# Altium PCB Template.PcbDoc
Units mil, origin at the board's own origin, x right, y up, seen from the top; angles counter-clockwise.
Board outline 6000 x 4000 mil, 2 copper layers (Top Layer, Bottom Layer); 58 components, 41 nets, 215 pads, 0 vias.
Unrouted connection lines stored in the file: 126.
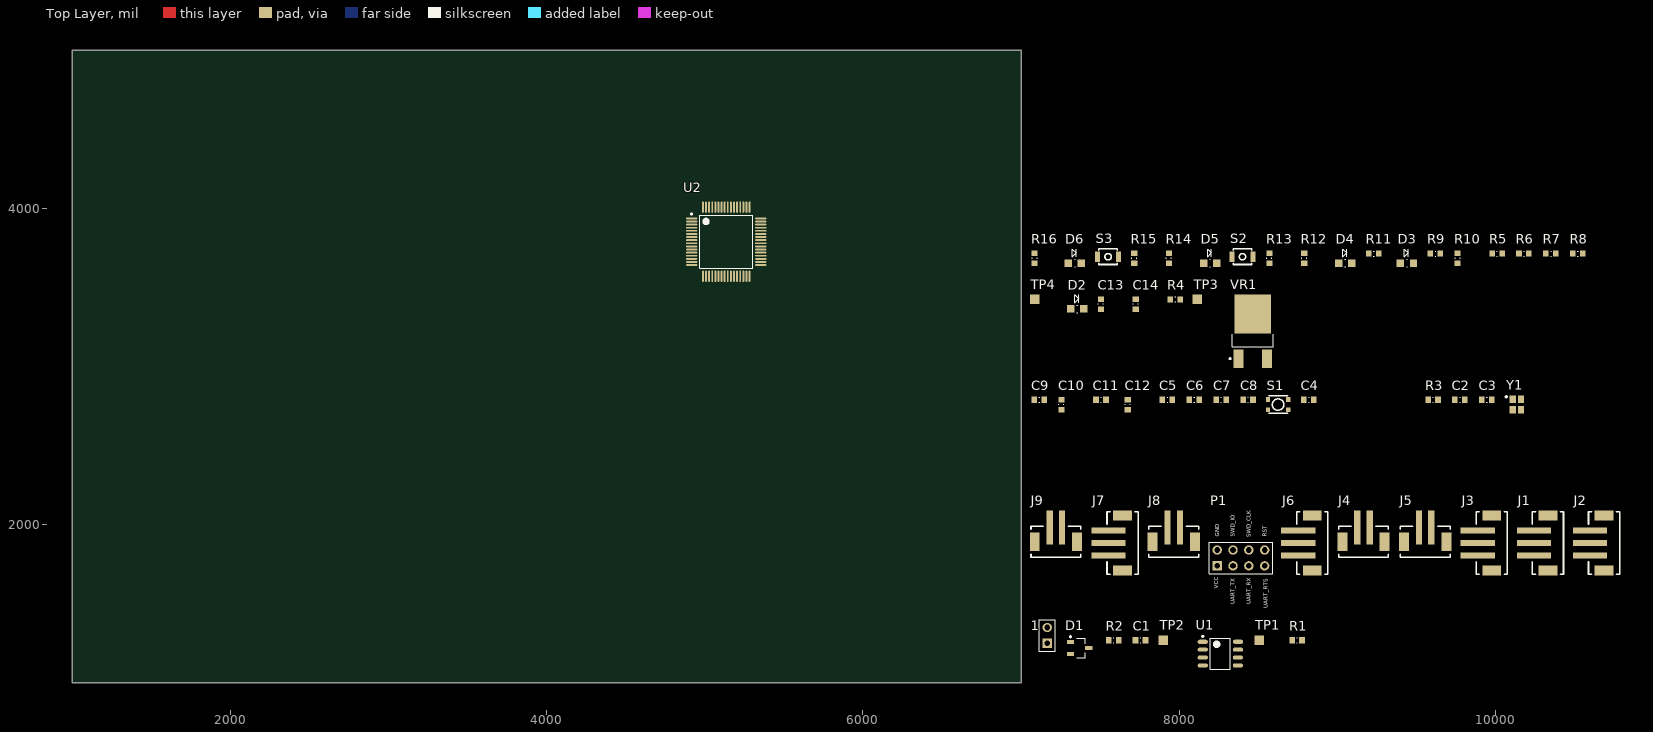
[diagram p0: Top Layer view]
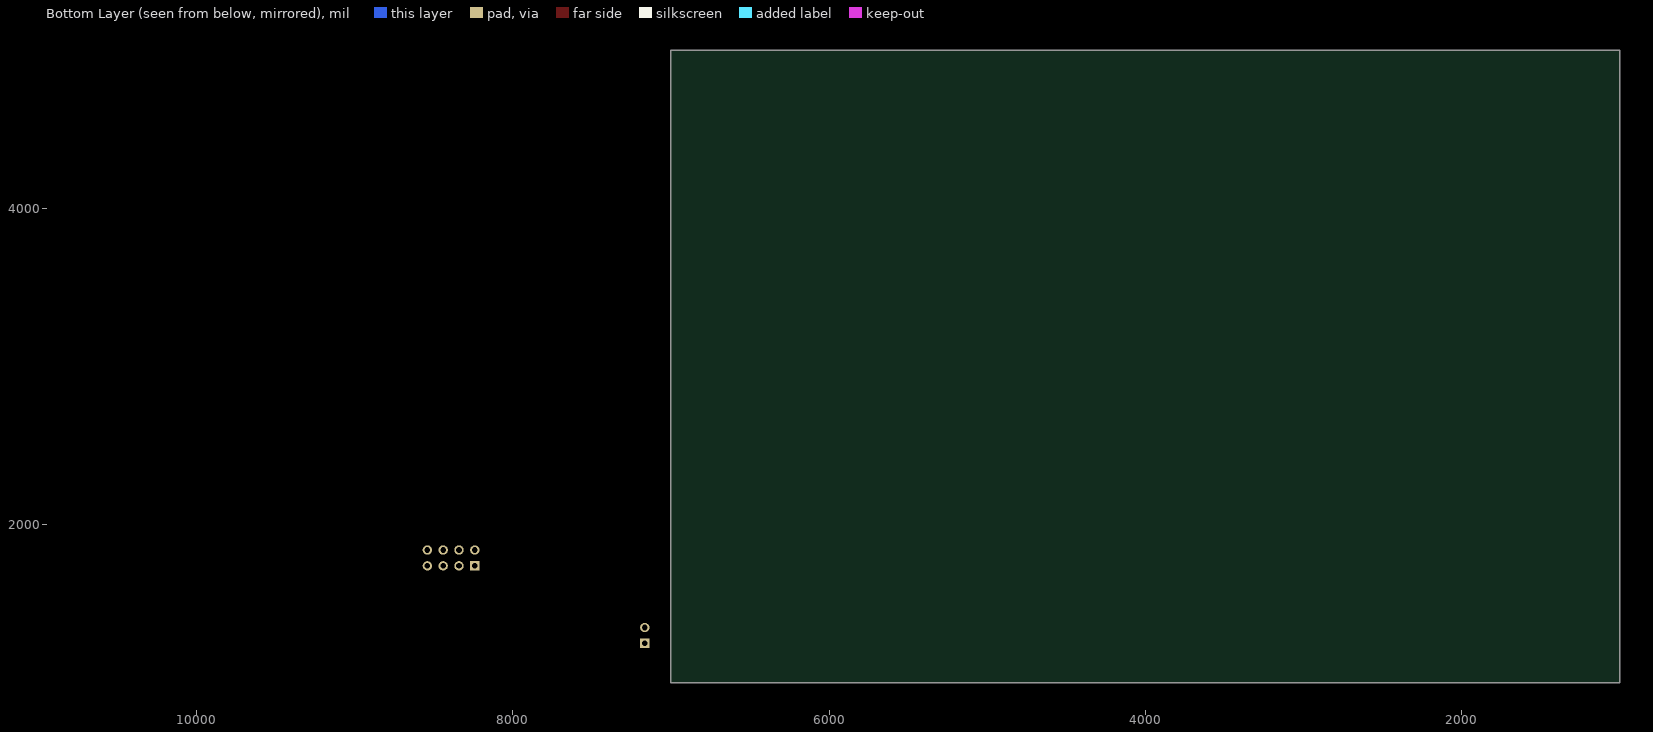
[diagram p1: Bottom Layer view, seen from below]

## Layer stack, top to bottom
Top Solder: solder mask 0.4, Solder Resist, Dk 3.5
Top Layer: signal copper 1.4
Dielectric 1: dielectric 12.6, FR-4, Dk 4.8
Bottom Layer: signal copper 1.4
Bottom Solder: solder mask 0.4, Solder Resist, Dk 3.5

## Board outline
1000,1000 7000,1000 7000,5000 1000,5000

## Design rules (kind name [scope] priority, off if disabled: settings)
Clearance [All] p1: gap=10 ignorepadtopadclearanceinfootprint=FALSE except(0: Arc-Hole Track-Hole SMDPad-Hole THPad-Hole Via-Hole Fill-Hole Poly-Hole Region-Hole Text-Hole; 5: SMDPad-SMDPad)
PolygonConnect [All] p1: connectstyle=Relief reliefconductorwidth=10 reliefentries=4 polygonreliefangle="90 Angle" airgapwidth=10
RoutingVias [All] p1: holewidth=28 width=50 viastyle="Through Hole" minholewidth=28 minwidth=50 maxholewidth=28 maxwidth=50
SolderMaskExpansion [All] p1: expansion=4
Width [All] p1: maxlimit=10 minlimit=10 preferedwidth=10
30 further rules are at their usual default settings.

## Classes and differential pairs
component class Support: D3 D4 D5 D6 R5 R6 R7 R8 R9 R10 R11 R12 R13 R14 R15 R16 S2 S3 UART_RTS UART_RX UART_TX
component class Power: C13 C14 D2 R4 TP3 TP4 VR1
component class MCU: C2 C3 C4 C5 C6 C7 C8 C9 C10 C11 C12 R3 S1 U2 Y1
component class Connectors: J1 J2 J3 J4 J5 J6 J7 J8 J9 P1
component class CAN: 1 C1 D1 R1 R2 TP1 TP2 U1

## Components (designator, comment, footprint, x,y, rotation, side; value= is the part's Value field where it differs from the comment)
1 "Header 2" HDR1X2 7165,1250 r90 top
C1 "CAP_0.1uF_16V_0603" CAPC0603(1608)55_N 7755,1270 r0 top value=0.1uF
C2 "CAP_15pF_0603" CAPC0603(1608)55_N 9775,2790 r0 top value=15pF
C3 "CAP_15pF_0603" CAPC0603(1608)55_N 9945,2790 r0 top value=15pF
C4 "CAP_0.1uF_16V_0603" CAPC0603(1608)55_N 8820,2790 r0 top value=0.1uF
C5 "CAP_0.1uF_16V_0603" CAPC0603(1608)55_N 7925,2790 r0 top value=0.1uF
C6 "CAP_0.1uF_16V_0603" CAPC0603(1608)55_N 8095,2790 r0 top value=0.1uF
C7 "CAP_0.1uF_16V_0603" CAPC0603(1608)55_N 8265,2790 r0 top value=0.1uF
C8 "CAP_4.7uF_0603" CAPC0603(1608)55_N 8435,2790 r0 top value=4.7uF
C9 "CAP_0.1uF_16V_0603" CAPC0603(1608)55_N 7115,2790 r0 top value=0.1uF
C10 "CAP_0.1uF_16V_0603" CAPC0603(1608)55_N 7255,2760 r90 top value=0.1uF
C11 "CAP_10nF_0603" CAPC0603(1608)55_N 7505,2790 r0 top value=10nF
C12 "CAP_1uF_16V_0603" CAPC0603(1608)55_N 7675,2760 r90 top value=1uF
C13 "CAP_0.33uF_16V_0603" CAPC0603(1608)55_N 7505,3395 r90 top value=0.33uF
C14 "CAP_10uF_0603" CAPC0603(1608)55_N 7725,3395 r90 top value=10uF
D1 "TVS_DIODE_CAN" TVS_DIODE_CAN 7370,1220 r0 top
D2 "DIO_LED_R" LED_0805 7355,3365 r0 top
D3 "DIO_LED_Y" LED_0805 9440,3655 r0 top
D4 "DIO_LED_G" LED_0805 9050,3655 r0 top
D5 "DIO_LED_G" LED_0805 8195,3655 r0 top
D6 "DIO_LED_G" LED_0805 7340,3655 r0 top
J1 "PH TOP SMD" JST-B3B-SM4-TB 10430,1885 r90 top
J2 "PH TOP SMD" JST-B3B-SM4-TB 10785,1885 r90 top
J3 "PH TOP SMD" JST-B3B-SM4-TB 10075,1885 r90 top
J4 "PH TOP SMD" JST-B2B-SM4-TB 9165,1795 r0 top
J5 "PH TOP SMD" JST-B2B-SM4-TB 9555,1795 r0 top
J6 "PH TOP SMD" JST-B3B-SM4-TB 8940,1885 r90 top
J7 "PH TOP SMD" JST-B3B-SM4-TB 7740,1885 r90 top
J8 "PH TOP SMD" JST-B2B-SM4-TB 7965,1795 r0 top
J9 "PH TOP SMD" JST-B2B-SM4-TB 7220,1795 r0 top
P1 "HEADER 4X2" HDR2X4_CEN 8240,1740 r0 top
R1 "RES_0R_0603" RESC0603(1608)_N 8745,1270 r0 top value=0R
R2 "RES_120R_0603" RESC0603(1608)_N 7585,1270 r0 top value=120R
R3 "RES_0R_0603" RESC0603(1608)_N 9605,2790 r0 top value=0R
R4 "RES_100R_0603" RESC0603(1608)_N 7975,3425 r0 top value=100R
R5 "RES_4K7_0603" RESC0603(1608)_N 10010,3715 r0 top value=4K7
R6 "RES_4K7_0603" RESC0603(1608)_N 10180,3715 r0 top value=4K7
R7 "RES_10K_0603" RESC0603(1608)_N 10350,3715 r0 top value=10K
R8 "RES_10K_0603" RESC0603(1608)_N 10520,3715 r0 top value=10K
R9 "RES_10K_0603" RESC0603(1608)_N 9620,3715 r0 top value=10K
R10 "RES_10K_0603" RESC0603(1608)_N 9760,3685 r90 top value=10K
R11 "RES_100R_0603" RESC0603(1608)_N 9230,3715 r0 top value=100R
R12 "RES_10K_0603" RESC0603(1608)_N 8790,3685 r90 top value=10K
R13 "RES_100R_0603" RESC0603(1608)_N 8570,3685 r90 top value=100R
R14 "RES_10K_0603" RESC0603(1608)_N 7935,3685 r90 top value=10K
R15 "RES_100R_0603" RESC0603(1608)_N 7715,3685 r90 top value=100R
R16 "RES_100R_0603" RESC0603(1608)_N 7085,3685 r90 top value=100R
S1 "SW_PWR" PTS830GM140 8625,2760 r0 top
S2 "SW_TACTILE" B3U-1100P 8400,3695 r0 top
S3 "SW_TACTILE" B3U-1100P 7550,3695 r0 top
TP1 "TESTPOINT_SMD" TESTPOINT 8505,1270 r0 top
TP2 "TESTPOINT_SMD" TESTPOINT 7900,1270 r90 top
TP3 "TESTPOINT_SMD" TESTPOINT 8115,3425 r90 top
TP4 "TESTPOINT_SMD" TESTPOINT 7085,3425 r90 top
U1 "IC TXRX CAN" LTC2875 8260,1185 r0 top
U2 "STM32F091RC" STM_LQFP64_N 5135,3790 r0 top
VR1 "5V0_3V3_LDO" VOLTAGE_REGULATOR 8465,3160 r0 top
Y1 "CRYSTAL_32MHZ" AVX-CX2520DB32000D0GEJZ1-4_V 10135,2760 r0 top

## Footprints (in the part's own frame and the unit in brackets; to place one, negate y for a bottom-side part, rotate by r counter-clockwise, add the part's x,y. Pads: shape width x height; smd on the part's side, far side on the other; paste and mask are expansions set on the pad)
AVX-CX2520DB32000D0GEJZ1-4_V [mm] "Hand Drawn, 4-Leads,Body 2.5x2mm"
  rect 1x1.2 smd: 1(-0.65,0.85) 2(-0.65,-0.85) 3(0.65,-0.85) 4(0.65,0.85)
  silkscreen extent -1.82,1.13 -1.58,1.38, body extent -1,-1.25 1,1.25, height 0.55
B3U-1100P [mm] "TACTILE SWITCH GREY"
  rect 0.8x1.7 smd: 1(-1.7,0) 2(1.7,0)
  silkscreen extent -1.5,-1.25 1.5,1.25
CAPC0603(1608)55_N [mm] "Chip Capacitor, Body 1.6x0.8mm, Height 0.55mm, IPC Medium Density"
  rect 0.9x1 smd: 1(-0.8,0) 2(0.8,0)
  silkscreen extent -0.05,-0.4 0.05,0.4, body extent -0.87,-0.48 0.88,0.47, height 0.55
HDR1X2 [mm] "Connector; Header; 2 Position"
  rect 1.5x1.5 hole 0.9: 1(0,0)
  round 1.5 hole 0.9: 2(2.54,0)
  silkscreen extent -1.27,-1.27 3.81,1.27
HDR2X4_CEN [mm] "Connector; Header; 4x2 Position"
  rect 1.5x1.5 hole 0.9: 1(0,0)
  round 1.5 hole 0.9: 2(2.54,0) 3(5.08,0) 4(7.62,0) 5(0,2.54) 6(2.54,2.54) 7(5.08,2.54) 8(7.62,2.54)
  silkscreen extent -1.27,-1.27 8.89,3.81
JST-B2B-SM4-TB [mm]
  rect 1x5.5 smd: 1(-1,4.75) 2(1,4.75)
  rect 1.6x3 smd: 3(-3.4,2.5) 4(3.4,2.5)
  silkscreen extent -4,0 4,5
JST-B3B-SM4-TB [mm]
  rect 1x5.5 smd: 1(-2,4.75) 2(0,4.75) 3(2,4.75)
  rect 1.6x3 smd: 4(-4.4,2.5) 5(4.4,2.5)
  silkscreen extent -5,0 5,5
LED_0805 [mm] "SMD, 2-Leads, Body 2x1.25mm"
  rect 1.2x1.2 smd: 1(-1.05,0) 2(1.05,0)
  silkscreen extent -0.41,-0.63 0.23,2.25, body extent -1,-0.63 1,0.63, height 0.8
LTC2875 [mm] "SOIC, 8-Leads, Body 5x4mm, Pitch 1.27mm, IPC Low Density"
  oval 1.65x0.65 smd: 1(-2.825,1.905) 2(-2.825,0.635) 3(-2.825,-0.635) 4(-2.825,-1.905) 5(2.825,-1.905) 6(2.825,-0.635) 7(2.825,0.635) 8(2.825,1.905)
  silkscreen extent -2.95,-2.5 1.6,2.9, body extent -3,-2.5 3,2.5, height 1.75
PTS830GM140 [mm] "PWR TACTILE SWITCH (RED)"
  rect 0.7x0.75 smd: 1(-1.625,0.825) 2(1.625,0.825) 3(-1.625,-0.825) 4(1.625,-0.825)
  silkscreen extent -1.53,-1.4 1.53,1.4
RESC0603(1608)_N [mm] "Chip Resistor, Body 1.6x0.8mm, IPC Medium Density"
  rect 0.9x1 smd: 1(-0.8,0) 2(0.8,0)
  silkscreen extent -0.05,-0.4 0.05,0.4, body extent -0.85,-0.47 0.85,0.47, height 0.6
STM_LQFP64_N [mm] "Thin QFP, 64-Leads, Body 10x10mm, Pitch 0.5mm, IPC Medium Density"
  oval 1.8x0.3 smd mask+0.05: 1(-5.55,3.75) 2(-5.55,3.25) 3(-5.55,2.75) 4(-5.55,2.25) 5(-5.55,1.75) 6(-5.55,1.25) 7(-5.55,0.75) 8(-5.55,0.25) 9(-5.55,-0.25) 10(-5.55,-0.75) 11(-5.55,-1.25) 12(-5.55,-1.75) 13(-5.55,-2.25) 14(-5.55,-2.75) 15(-5.55,-3.25) 16(-5.55,-3.75) 33(5.55,-3.75) 34(5.55,-3.25) 35(5.55,-2.75) 36(5.55,-2.25) 37(5.55,-1.75) 38(5.55,-1.25) 39(5.55,-0.75) 40(5.55,-0.25) 41(5.55,0.25) 42(5.55,0.75) 43(5.55,1.25) 44(5.55,1.75) 45(5.55,2.25) 46(5.55,2.75) 47(5.55,3.25) 48(5.55,3.75)
  oval 0.3x1.8 smd mask+0.05: 17(-3.75,-5.55) 18(-3.25,-5.55) 19(-2.75,-5.55) 20(-2.25,-5.55) 21(-1.75,-5.55) 22(-1.25,-5.55) 23(-0.75,-5.55) 24(-0.25,-5.55) 25(0.25,-5.55) 26(0.75,-5.55) 27(1.25,-5.55) 28(1.75,-5.55) 29(2.25,-5.55) 30(2.75,-5.55) 31(3.25,-5.55) 32(3.75,-5.55) 49(3.75,5.55) 50(3.25,5.55) 51(2.75,5.55) 52(2.25,5.55) 53(1.75,5.55) 54(1.25,5.55) 55(0.75,5.55) 56(0.25,5.55) 57(-0.25,5.55) 58(-0.75,5.55) 59(-1.25,5.55) 60(-1.75,5.55) 61(-2.25,5.55) 62(-2.75,5.55) 63(-3.25,5.55) 64(-3.75,5.55)
  silkscreen extent -5.67,-4.25 4.25,4.57, body extent -5,-5 5,5, height 1.6
TESTPOINT [mil]
  rect 60x60 smd: 1(0,0)
TVS_DIODE_CAN [mm] "SOT23, 3-Leads, Body 2.95x2.80mm, Pitch 0.95mm, IPC Low Density"
  rect 1.15x0.65 smd: 1(-1.475,0.95) 2(-1.475,-0.95) 3(1.475,0)
  silkscreen extent -1.6,-1.55 0.9,1.95, body extent -1.5,-1.55 1.5,1.55, height 1.25
VOLTAGE_REGULATOR [mm] "DPAK, 3-Leads, Body 6.095x6.54mm, Pitch 4.57mm"
  rect 1.6x3 smd: 1(-2.285,-2.79) 3(2.285,-2.79)
  rect 5.8x6.2 smd: 4(0,4.39)
  silkscreen extent -3.76,-2.91 3.27,1.14, body extent -3.27,-0.84 3.27,5.25, height 2.38

## Part data
1: "Header, 2-Pin", LatestRevisionDate=17-Jul-2002, LatestRevisionNote="Re-released for DXP Platform.", Publisher="Altium Limited"
C1 C4 C5 C6 C7 C9 C10: "CAP CER 0.1UF 16V X7R 0603", Manufacturer=Yageo, Package="0603 (1608 Metric)", Part Number=CC0603KRX7R7BB104, Temperature Coefficient=X7R, Voltage Rating=16V, Dimensions="0.063\" L x 0.031\" W (1.60mm x 0.80mm)"
C2 C3: "CAP CER 15PF 250V NPO 0603", Manufacturer=Yageo, Package="0603 (1608 Metric)", Part Number=AC0603JRNPOYBN150, Temperature Coefficient=NP0, Voltage Rating=250v, Dimensions="0.063\" L x 0.031\" W (1.60mm x 0.80mm)"
C8: "CAP CER 4.7UF 6.3V X5R 0603", Manufacturer=Yageo, Package="0603 (1608 Metric)", Part Number=CC0603KRX5R5BB475, Temperature Coefficient=X5R, Voltage Rating=6.3V, Dimensions="0.063\" L x 0.031\" W (1.60mm x 0.80mm)"
C11: "CAP CER 10000PF 16V X7R 0603", Manufacturer=Yageo, Package="0603 (1608 Metric)", Part Number=CC0603KRX7R7BB103, Temperature Coefficient=X7R, Voltage Rating=16V, Dimensions="0.063\" L x 0.031\" W (1.60mm x 0.80mm)"
C12: "CAP CER 1UF 16V Y5V 0603", Manufacturer=Yageo, Package="0603 (1608 Metric)", Part Number=CC0603ZRY5V7BB105, Temperature Coefficient=Y5V, Voltage Rating=16V, Dimensions="0.063\" L x 0.031\" W (1.60mm x 0.80mm)"
C13: "CAP CER 0.33UF 16V X7R 0603", Manufacturer="Murata Electronics North America", Package="0603 (1608 Metric)", Part Number=GRM188R71C334KA01D, Temperature Coefficient=X7R, Voltage Rating=16V, Dimensions="0.063\" L x 0.031\" W (1.60mm x 0.80mm)"
C14: "CAP CER 10UF 10V X5R 0603", Manufacturer=Yageo, Package="0603 (1608 Metric)", Part Number=CC0603MRX5R6BB106, Temperature Coefficient=X5R, Voltage Rating=10V, Dimensions="0.063\" L x 0.031\" W (1.60mm x 0.80mm)"
D1: "TVS DIODE 24V 41V SOT323-3", Manufacturer="Nexperia USA Inc.", Package="SC-70, SOT-323", Part Number=PESD2CAN,215, ComponentLink1Description=Datasheet, ComponentLink1URL=https://assets.nexperia.com/documents/data-sheet/PESD1CAN-U.pdf
D2: "LED RED DIFFUSED 0805 SMD", Forward Voltage Drop=2V, Manufacturer=OSRAM, Package="0805 (2012 Metric)", Part Number="LS R976-NR-1"
D3: "LED YELLOW DIFFUSED 0805 SMD", Forward Voltage Drop=2.2V, Manufacturer=OSRAM, Package="0805 (2012 Metric)", Part Number="LY R976-PS-36"
D4 D5 D6: "LED GREEN DIFFUSED 0805 SMD", Forward Voltage Drop=2.2V, Manufacturer=OSRAM, Package="0805 (2012 Metric)", Part Number="LG R971-KN-1"
J1 J2 J3 J6 J7: library part CON_3M_PH_TOP_SMT, "CONN HEADER PH TOP 3POS 2MM SMD", Manufacturer=JST, Part Number=B3B-PH-SM4-TB, ComponentLink1Description=Datasheet, ComponentLink1URL=http://www.jst-mfg.com/product/pdf/eng/ePH.pdf
J4 J5 J8 J9: library part CON_2M_PH_TOP_SMT, "CONN HEADER PH TOP 2POS 2MM SMD", Manufacturer=JST, Part Number=B2B-PH-SM4-TB, ComponentLink1Description=Datasheet, ComponentLink1URL=http://www.jst-mfg.com/product/pdf/eng/ePH.pdf
P1: "Header, 4-Pin, Dual row", LatestRevisionDate=17-Jul-2002, LatestRevisionNote="Re-released for DXP Platform.", Publisher="Altium Limited"
R1 R3: "RES SMD 0 OHM JUMPER 1/10W 0603", Manufacturer=Yageo, Package="0603 (1608 Metric)", Part Number (MPN)=RC0603JR-070RL, Dimensions="0.063\" L x 0.031\" W (1.60mm x 0.80mm)"
R2: "RES SMD 120 OHM 5% 1/10W 0603", Manufacturer=Yageo, Package="0603 (1608 Metric)", Part Number (MPN)=RC0603JR-07120RL, Tolerance=5%, Dimensions="0.063\" L x 0.031\" W (1.60mm x 0.80mm)"
R4 R11 R13 R15 R16: "RES SMD 100 OHM 1% 1/10W 0603", Manufacturer=Yageo, Package="0603 (1608 Metric)", Part Number (MPN)=RC0603FR-07100RL, Tolerance=1%, Dimensions="0.063\" L x 0.031\" W (1.60mm x 0.80mm)"
R5 R6: "RES SMD 4.7K OHM 5% 1/10W 0603", Manufacturer=Yageo, Package="0603 (1608 Metric)", Part Number (MPN)=RC0603JR-074K7L, Tolerance=5%, Dimensions="0.063\" L x 0.031\" W (1.60mm x 0.80mm)"
R7 R8 R9 R10 R12 R14: "RES SMD 10K OHM 5% 1/10W 0603", Manufacturer=Yageo, Package="0603 (1608 Metric)", Part Number (MPN)=RC0603JR-0710KL, Tolerance=5%, Dimensions="0.063\" L x 0.031\" W (1.60mm x 0.80mm)"
S1: "Power Switch (Red)", Part Number="PTS830GM140 SMTR LFS", ComponentLink1Description=Datasheet, ComponentLink1URL=https://www.ckswitches.com/media/1478/pts830.pdf
S2 S3: "Tactile Switch (Grey)", Digikey Part Number=SW1021TR-ND, Manufacturer Part Number=B3U-1100P
U1: library part LTC2875, "IC TXRX CAN 4MBPS 8SO", Manufacturer="Linear Technologies", Package="8-SOIC (0.154\", 3.90mm Width)", Part Number=LTC2875IS8#PBF, ComponentLink1Description=Datasheet, ComponentLink1URL=https://www.analog.com/media/en/technical-documentation/data-sheets/2875f.pdf
U2: Manufacturer=STMicroelectronics, Package=64-LQFP, ComponentLink1Description=Datasheet, ComponentLink1URL=https://www.st.com/content/ccc/resource/technical/document/datasheet/95/3c/2e/5b/21/09/45/a6/DM00115237.pdf/files/DM00115237.pdf/jcr:content/translations/en.DM00115237.pdf#%5B%7B%22num%22%3A96%2C%22gen%22%3A0%7D%2C%7B%22name%22%3A%22XYZ%22%7D%2C67%2C755%2Cnull%5D, Part Number=STM32F091RC
VR1: "IC REG LINEAR 3.3V 1A DPAK", Current Output=1A, Manufacturer="ON Semiconductor", Part Number=NCP1117DT33T5G
Y1: "CRYSTAL 32MHZ 8PF SMD", Manufacturer="Kyocera International Inc. Electronic Components", Package="4-SMD, No Lead", Part Number=CX2520DB32000D0GPSC1, Dimensions="0.098\" L x 0.079\" W (2.50mm x 2.00mm)"

## Nets (pads, with @x,y where several pads share a name; then routed paths per layer and width w, separated by ;. In a path a pad name is that pad's centre, name@x,y a point inside that pad or via, vN(x,y) a via of type N, cw(c..) or ccw(c..) an arc to the next point about the centre after c; other vN are vias at no path point)
+3V3: C1.2 C5.2 C6.2 C7.2 C8.2 C9.2 C10.2 C11.2 C12.2 C14.2 J4.1 P1.1 R4.2 R5.2 R6.2 R7.2 R8.2 R12.2 R14.1 TP3.1 U1.3 U2.1 U2.13 U2.19 U2.32 U2.48 U2.64 VR1.3
+5V0: C13.2 J5.1 VR1.1
GND: C1.1 C2.1 C3.1 C4.1 C5.1 C6.1 C7.1 C8.1 C9.1 C10.1 C11.1 C12.1 C13.1 C14.1 D1.3 D2.2 D3.2 D4.2 D5.2 D6.2 J1.3 J2.3 J3.3 J4.2 J5.2 J6.3 J7.3 P1.5 R1.2 R9.1 R10.1 S1.1 S2.2 S3.2 TP4.1 U1.2 U2.12 U2.18 U2.31 U2.47 U2.63 Y1.2
Net1_1: 1.1 D1.2 J3.2 J6.2 TP2.1 U1.6
Net1_2: 1.2 R2.2
NetC2_2: C2.2 R3.2 Y1.1
NetC3_2: C3.2 U2.5 Y1.3
NetC4_2: C4.2 P1.8 S1.4 U2.7
NetD1_1: D1.1 J3.1 J6.1 R2.1 TP1.1 U1.7
NetD2_1: D2.1 R4.1
NetD3_1: D3.1 R11.2
NetD4_1: D4.1 R13.2
NetD5_1: D5.1 R15.2
NetD6_1: D6.1 R16.2
NetJ1_1: J1.1 R10.2 U2.34
NetJ1_2: J1.2 U2.35
NetJ2_1: J2.1 R9.2 U2.36
NetJ2_2: J2.2 U2.37
NetJ7_1: J7.1 R7.1 U2.29
NetJ7_2: J7.2 R8.1 U2.30
NetJ8_1: J8.1 U2.20
NetJ8_2: J8.2 U2.21
NetJ9_1: J9.1 R5.1 U2.59
NetJ9_2: J9.2 R6.1 U2.58
NetP1_2: P1.2 U2.51
NetP1_3: P1.3 U2.52
NetP1_4: P1.4 U2.54
NetP1_6: P1.6 U2.46
NetP1_7: P1.7 U2.49
NetR1_1: R1.1 U1.8
NetR3_1: R3.1 U2.6
NetR11_1: R11.1 U2.8
NetR12_1: R12.1 S2.1 U2.14
NetR13_1: R13.1 U2.9
NetR14_2: R14.2 S3.1 U2.15
NetR15_1: R15.1 U2.10
NetR16_1: R16.1 U2.11
NetU1_1: U1.1 U2.62
NetU1_4: U1.4 U2.61
NetU2_26: U2.26
NetU2_27: U2.27
pads on no net: J1.4 J1.5 J2.4 J2.5 J3.4 J3.5 J4.3 J4.4 J5.3 J5.4 J6.4 J6.5 J7.4 J7.5 J8.3 J8.4 J9.3 J9.4 S1.2 S1.3 U1.5 U2.2 U2.3 U2.4 U2.16 U2.17 U2.22 U2.23 U2.24 U2.25 U2.28 U2.33 U2.38 U2.39 U2.40 U2.41 U2.42 U2.43 U2.44 U2.45 U2.50 U2.53 U2.55 U2.56 U2.57 U2.60 VR1.4 Y1.4

## Text inside footprints (layer, text, board x,y; h text height)
P1: Top Overlay "GND" at 8251.81,1925.04 h25 r90; Top Overlay "VCC" at 8247.87,1594.33 h25 r90; Top Overlay "RST" at 8551.81,1925.04 h25 r90; Top Overlay "SWD_CLK" at 8452.6,1921.1 h25 r90; Top Overlay "SWD_IO" at 8350.24,1925.04 h25 r90; Top Overlay "UART_RTS" at 8558.9,1472.28 h25 r90; Top Overlay "UART_RX" at 8452.6,1495.91 h25 r90; Top Overlay "UART_TX" at 8350.24,1495.91 h25 r90